# Altium PCB 主板-双BH.PcbDoc (part 2 of 4)
Units mm, origin at the board's own origin, x right, y up, seen from the top; angles counter-clockwise.
Board outline 97.69 x 103.45 mm, 2 copper layers (Top Layer, Bottom Layer); 79 components, 77 nets, 266 pads, 287 vias.
Unrouted connection lines stored in the file: 7.
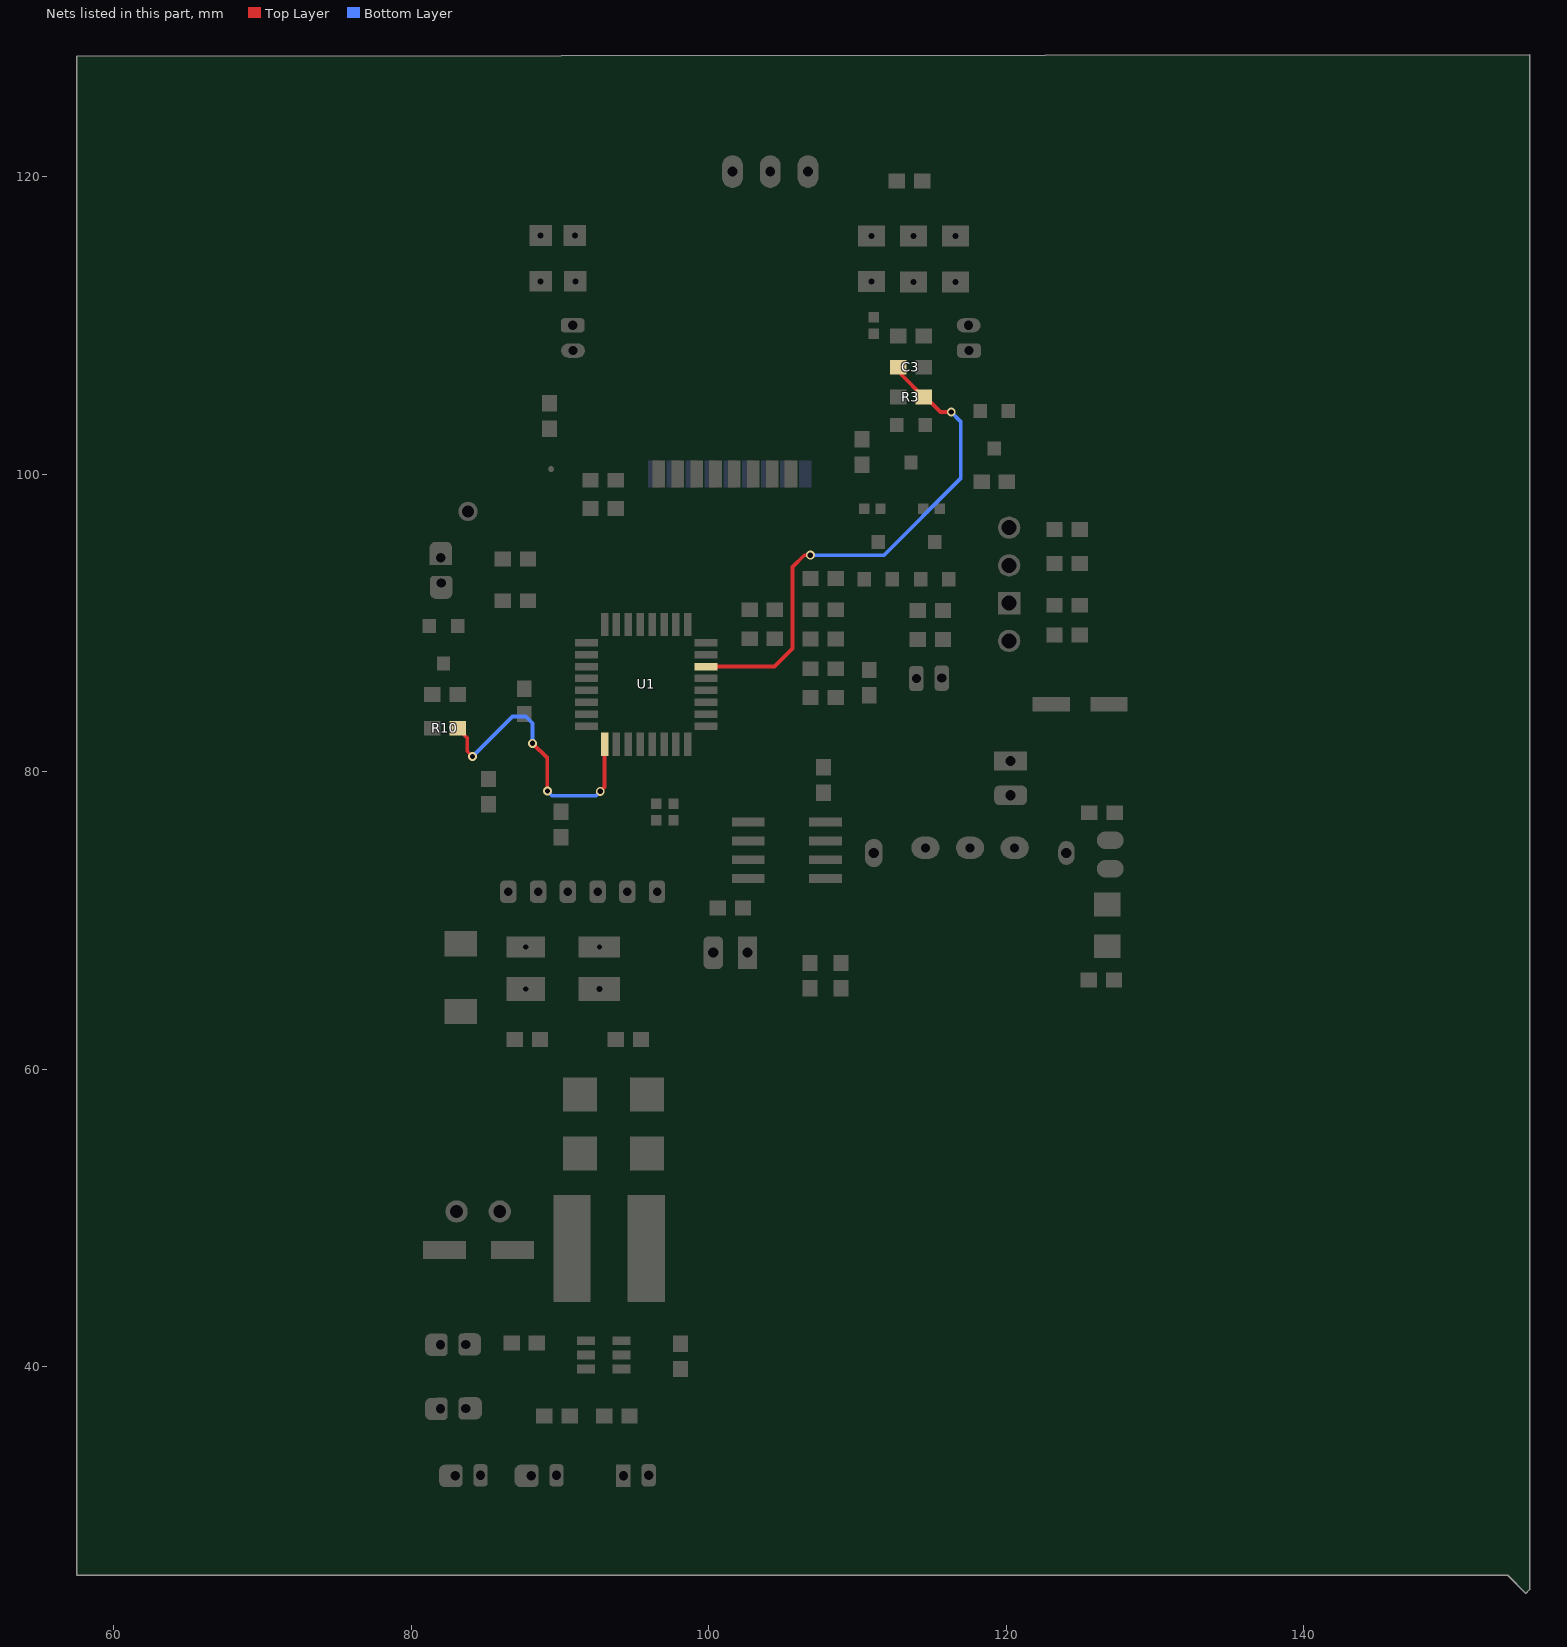
[diagram p2: the nets of this part, all layers, seen from the top]

## Via types
v1: diameter 0.6, hole 0.35, Top Layer to Bottom Layer, 106 vias
v2: diameter 0.7, hole 0.4, Top Layer to Bottom Layer, 104 vias
v3: diameter 0.8, hole 0.5, Top Layer to Bottom Layer, tented both sides, 35 vias
v4: diameter 0.8, hole 0.5, Top Layer to Bottom Layer, 16 vias
v5: diameter 1, hole 0.75, Top Layer to Bottom Layer, tented both sides, 5 vias
v6: diameter 3.4, hole 2.9, Top Layer to Bottom Layer, 4 vias
v7: diameter 1, hole 0.6, Top Layer to Bottom Layer, tented both sides, 3 vias
v8: diameter 0.65, hole 0.4, Top Layer to Bottom Layer, tented both sides, 2 vias
v9: diameter 0.8, hole 0.35, Top Layer to Bottom Layer, 2 vias
v10: diameter 0.7, hole 0.35, Top Layer to Bottom Layer, 2 vias
v11: diameter 1.1, hole 0.68, Top Layer to Bottom Layer, 2 vias
v12: diameter 1, hole 0.56, Top Layer to Bottom Layer, tented both sides, 2 vias
v13: diameter 0.62, hole 0.4, Top Layer to Bottom Layer, 1 vias
v14: diameter 0.95, hole 0.5, Top Layer to Bottom Layer, 1 vias
v15: diameter 0.7, hole 0.4, Top Layer to Bottom Layer, tented bottom, 1 vias
v16: diameter 0.8, hole 0.5, Top Layer to Bottom Layer, tented bottom, 1 vias

## Nets (pads, with @x,y where several pads share a name; then routed paths per layer and width w, separated by ;. In a path a pad name is that pad's centre, name@x,y a point inside that pad or via, vN(x,y) a via of type N, cw(c..) or ccw(c..) an arc to the next point about the centre after c; other vN are vias at no path point) (continued)
FL-U: C3.2 R3.1 U1.6 | length 35
  Top Layer w0.254: U1.6@99.825,87.077 104.426,87.077 105.639,88.29 105.639,93.777 106.426,94.564 v1(106.832,94.564) ; C3.2@112.522,106.985 C3.2@112.831,106.985 ; C3.2@112.959,106.7 114.45,105.209 R3.1@114.45,105.105 ; R3.1@114.579,105.207 115.595,104.191 v1(116.307,104.191)
  Bottom Layer w0.254: v1(106.832,94.564) 111.785,94.564 116.942,99.72 116.942,100.609 116.942,103.556 v1(116.307,104.191)
FM: R10.2 U1.25 | length 19.7
  Top Layer w0.254: R10.2@83.121,82.931 83.769,82.282 83.769,81.382 v1(84.125,81.026) ; v1(88.163,81.915) 89.154,80.924 v1(89.154,78.715) ; v1(92.71,78.689) 93,78.979 U1.25@93,81.853
  Bottom Layer w0.254: v1(84.125,81.026) 86.817,83.718 87.706,83.718 88.163,83.261 v1(88.163,81.915) ; v1(89.154,78.715) 89.484,78.384 92.405,78.384 v1(92.71,78.689)